# Altium PCB XTR111_PCB.PcbDoc
Units mil, origin at the board's own origin, x right, y up, seen from the top; angles counter-clockwise.
Board outline 1455 x 1260 mil, 2 copper layers (Top Layer, Bottom Layer); 18 components, 13 nets, 49 pads, 5 vias.
Unrouted connection lines stored in the file: 35.
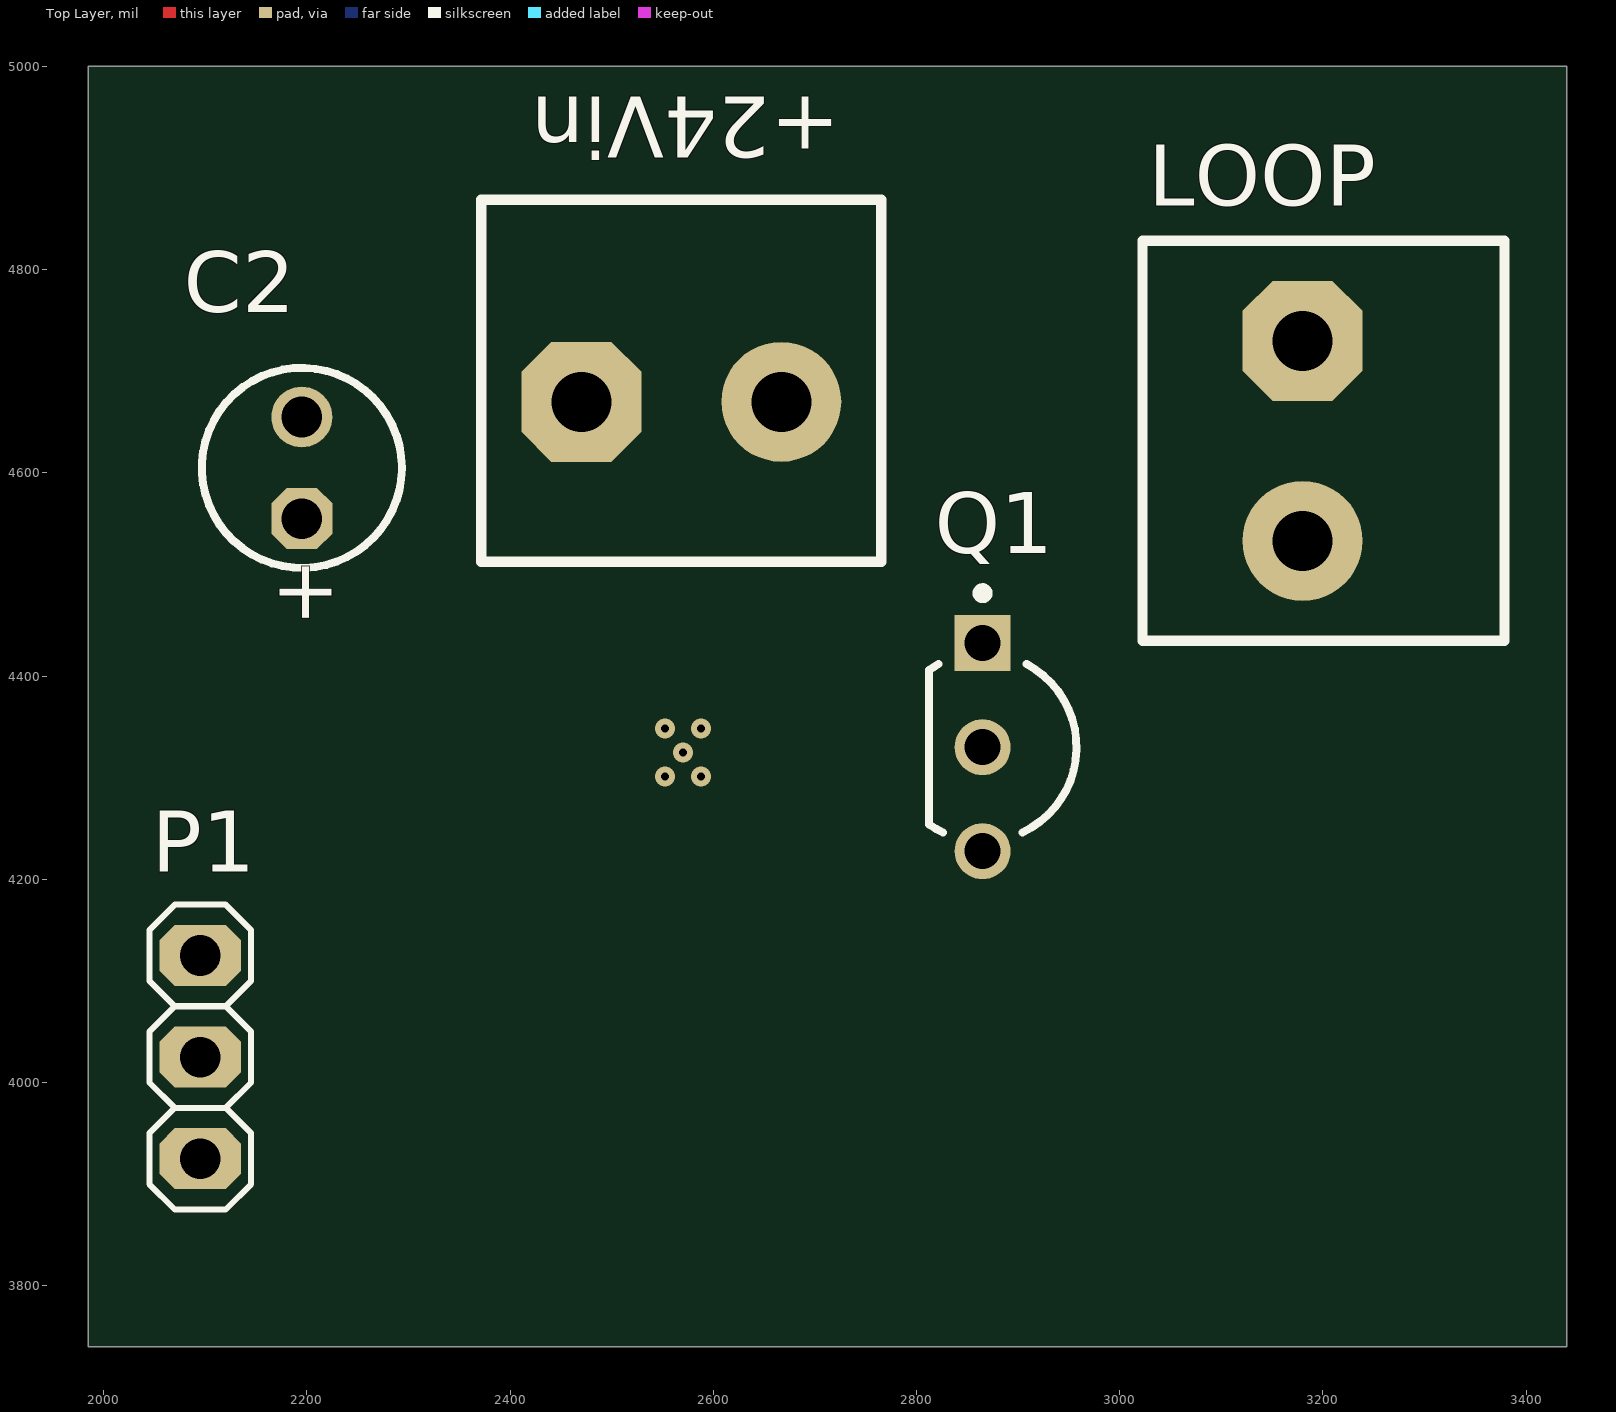
[diagram p0: Top Layer view]
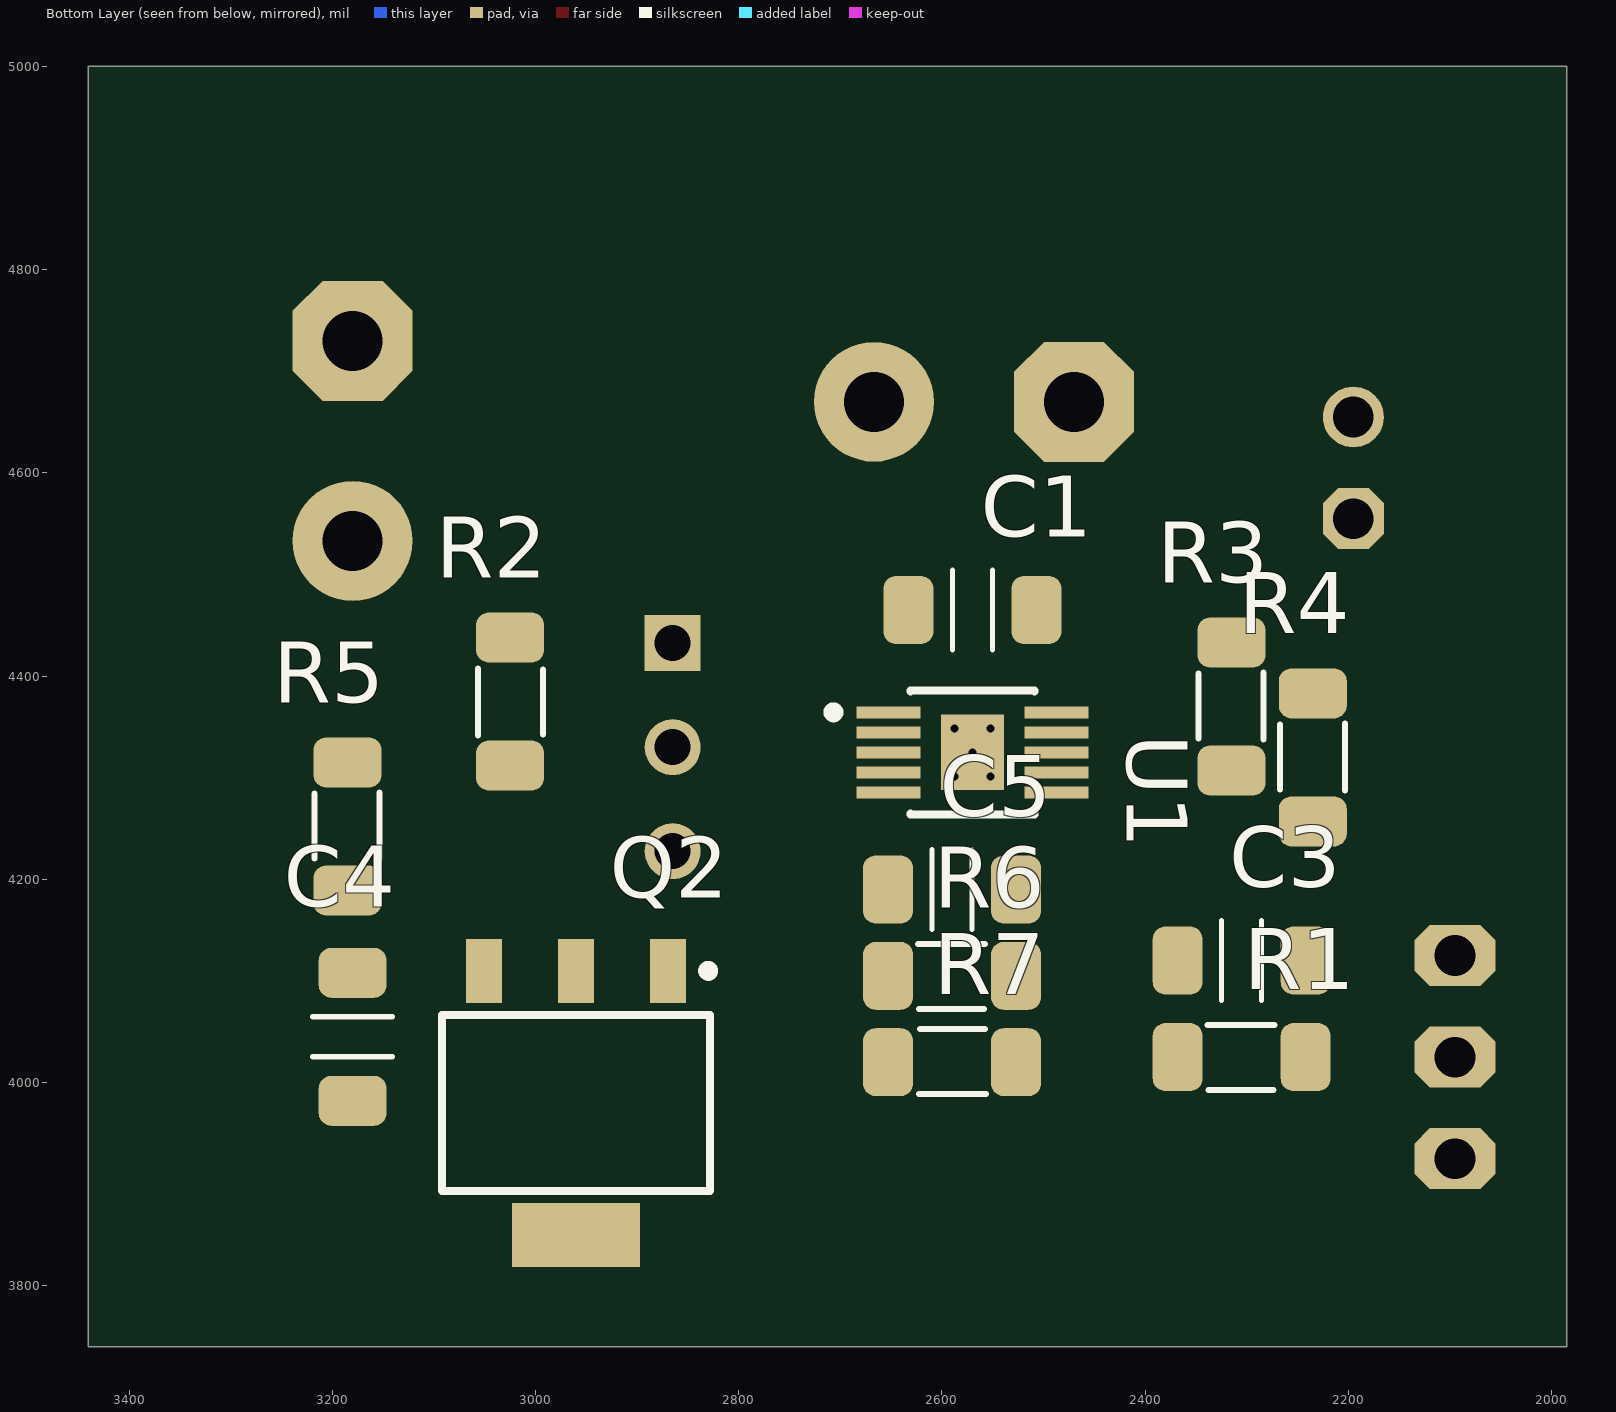
[diagram p1: Bottom Layer view, seen from below]

## Layer stack, top to bottom
Top Solder: solder mask 0.4, Solder Resist, Dk 3.5
Top Layer: signal copper 1.4
Dielectric 1: dielectric 12.6, FR-4, Dk 4.8
Bottom Layer: signal copper 1.4
Bottom Solder: solder mask 0.4, Solder Resist, Dk 3.5

## Board outline
1985,3740 3440,3740 3440,5000 1985,5000

## Design rules (kind name [scope] priority, off if disabled: settings)
Clearance [All] p1: gap=10 ignorepadtopadclearanceinfootprint=FALSE except(0: Arc-Hole Track-Hole SMDPad-Hole THPad-Hole Via-Hole Fill-Hole Poly-Hole Region-Hole Text-Hole)
PolygonConnect [All] p1: connectstyle=Relief reliefconductorwidth=10 reliefentries=4 polygonreliefangle="90 Angle" airgapwidth=10
RoutingVias [All] p1: holewidth=28 width=50 viastyle="Through Hole" minholewidth=28 minwidth=50 maxholewidth=28 maxwidth=50
SolderMaskExpansion [All] p1: expansion=4
Width [All] p1: maxlimit=10 minlimit=10 preferedwidth=10
30 further rules are at their usual default settings.

## Components (designator, comment, footprint, x,y, rotation, side; value= is the part's Value field where it differs from the comment)
+24Vin "CON2 pin blue" "BORNE 2P" 2666.85,4670 r180 top
C1 "100nF" "CAP 1206" 2570,4465 r0 bottom
C2 "10uF" "CAPRADIAL 6.3X11 - 10u" 2195,4605 r90 top
C3 "100nF" "CAP 1206" 2305,4120 r0 bottom
C4 "100nF" "CAP 1206" 3180,4045 r90 bottom
C5 "100nF" "CAP 1206" 2590,4190 r0 bottom
LOOP "CON2 pin blue" "BORNE 2P" 3180,4533.15 r90 top
P1 "Header 3" 1X03 2095,4025 r90 top
Q1 "2N5087RLRAG" ONSC-TO-92-3-29-11_AM_BL 2865,4330 r270 top
Q2 "BSP170P" INF-PG-SOT223_SC-73_N 2960,3980 r270 bottom
R1 "1k" "R1206 Negro" 2305,4025 r180 bottom value=15
R2 "1k" "R1206 Negro" 3025,4375 r90 bottom value=15
R3 "1k" "R1206 Negro" 2315,4370 r270 bottom value=10k
R4 "1k" "R1206 Negro" 2235,4320 r270 bottom value=2.49k
R5 "1k" "R1206 Negro" 3185,4252.01 r270 bottom value=15
R6 "1k" "R1206 Negro" 2590,4105 r180 bottom value=8.25k
R7 "1k" "R1206 Negro" 2590,4020 r0 bottom value=10k
U1 "XTR111AIDGQR" FP-DGQ0010D-MFG 2570,4325 r180 bottom

## Footprints (in the part's own frame and the unit in brackets; to place one, negate y for a bottom-side part, rotate by r counter-clockwise, add the part's x,y. Pads: shape width x height; smd on the part's side, far side on the other; paste and mask are expansions set on the pad)
1X03 [mil]
  oct 60x80 hole 40: 1(-100,0) 2(0,0) 3(100,0)
  silkscreen extent -150,-50 150,50, body extent -150,-57 150,57, height 335
"BORNE 2P" [mm] "Bornera doble"
  oct 3x3 hole 1.5: 1(5,0)
  round 3 hole 1.5: 2(0,0)
  silkscreen extent -2.5,-5.05 7.5,4, body extent -3,-5 7.5,4, height 12.5
"CAP 1206" [mm]
  rrect50% 1.25x1.7 smd: 1(-1.6,0) 2(1.6,0)
  silkscreen extent -0.5,-1 0.5,1, body extent -1.6,-0.8 1.6,0.8, height 1
"CAPRADIAL 6.3X11 - 10u" [mil] "Capacitor, Electrolytic, Radial; Body 5 x 6.8 mm (Dia.xH typ); Pin Spacing 2 mm (typ)"
  oct 60x60 hole 40: 1(-50,0)
  round 60 hole 40: 2(50,0)
  silkscreen extent -98,-98 98,98, body extent -127,-124 123,126, height 454
FP-DGQ0010D-MFG [mm]
  rect 1.6x0.3 smd paste-1000 mask+0: 1(-2.1,1) 2(-2.1,0.5) 3(-2.1,0) 4(-2.1,-0.5) 5(-2.1,-1) 6(2.1,-1) 7(2.1,-0.5) 8(2.1,0) 9(2.1,0.5) 10(2.1,1)
  rect 1.57x1.88 smd paste+0 mask+0: 11(0,0)
  silkscreen extent -3.6,-1.55 1.55,1.55, body extent -2.45,-1.5 2.45,1.5, height 1.1
INF-PG-SOT223_SC-73_N [mm] "SOT223, 4-Leads, Body 6.5x3.5mm, Pitch 2.3mm, IPC Medium Density"
  rect 1.6x0.9 smd: 1(-3.3,2.3) 2(-3.3,0) 3(-3.3,-2.3)
  rect 1.6x3.2 smd: 4(3.3,0)
  silkscreen extent -3.42,-3.35 2.2,3.42, body extent -1.85,-3.35 1.85,3.35, height 1.8
ONSC-TO-92-3-29-11_AM_BL [mm] "TO, 3-Leads, Body Dia 4.7mm, Pitch 2.6mm"
  rect 1.4x1.4 hole 0.9: 1(-2.6,0)
  round 1.4 hole 0.9: 2(0,0) 3(2.6,0)
  silkscreen extent -3.97,-1.34 2.13,2.35, body extent -2.84,-1.34 2.84,2.35, height 5.33
"R1206 Negro" [mm] "Chip Resistor, Empaque 1206"
  rrect50% 1.25x1.7 smd: 1(-1.6,0) 2(1.6,0)
  silkscreen extent -0.85,-0.82 0.82,0.8, body extent -1.6,-0.8 1.6,0.8, height 1

## Part data
+24Vin LOOP: "Connector blue screw"
C1 C3 C4 C5: library part "Cap ceramic", "CAP-100nf / 0402B104K250CT -0603B104K250CT-0805B104K250CT-1206B104K250CT", PartNumber=0402B104K250CT
C2: library part "CAP ELECT", "CAP_AXIAL"
P1: "Header, 3-Pin", LatestRevisionDate=17-Jul-2002, LatestRevisionNote="Re-released for DXP Platform.", Publisher="Altium Limited"
Q1: library part CMP-1048-01483-1, "Amplifier Transistor, PNP Silicon, 3-Pin TO-92, Pb-Free, Tape and Reel", Manufacturer="On Semiconductor", ComponentLink1Description="Manufacturer URL", ComponentLink1URL=http://www.onsemi.com/, ComponentLink2Description=Datasheet, ComponentLink2URL=http://www.onsemi.com/pub_link/Collateral/2N5087-D.PDF, ComponentLink3Description="Package Specification", ComponentLink3URL=http://www.onsemi.com/pub_link/Collateral/MAC97-D.PDF, DatasheetVersion="Rev. 5", fT Min (MHz)=40, IC Continuous (A)=0.05, Mounting Technology="Through Hole", PackageDescription="3-Pin Transistor Outline, Body 4.825 x 3.685 mm, Pitch 1.27 mm", PackageReference=TO-92-3-29-11_AM_BL, PackageVersion="Rev. AM", Packing="Tape and Reel", PartNumber=2N5087RLRAG, Polarity=PNP, RoHS=TRUE
Q2: library part CMP-1099-00020-1, "P-Channel SIPMOS Small-Signal-Transistor, -60 V VDS, -1.9 A ID, -55 to 150 degC, PG-SOT223 (SC-73), Reel, Green", Manufacturer=Infineon, ComponentLink1Description="Manufacturer URL", ComponentLink1URL=http://www.infineon.com/, ComponentLink2Description=Datasheet, ComponentLink2URL=http://www.infineon.com/dgdl/BSP170P_Rev2.53.pdf?folderId=db3a304314dca38901154a72e3951a65&fileId=db3a30433b47825b013b5fdad470576f, ComponentLink3Description="Package Specification", ComponentLink3URL=http://www.infineon.com/dgdl/SOT223-Package_Overview.pdf?folderId=db3a30431936bc4b0119530470b03c3d&fileId=db3a30431936bc4b0119531d40b93c5c, DatasheetVersion="Rev. 2.53", Green=TRUE, Halogen-free=TRUE, ID (max)="-1.9 A", IDpuls (max)="-7.6 A", Mode=Enhancement, Mounting Technology="Surface Mount", PackageDescription="4-Pin Small Outline Transistor Package, 6.5 x 3.5 mm Body, 2.3 mm Pitch", PackageReference="PG-SOT223 (SC-73)", PackageVersion=Apr-08, Packing=Reel, PartNumber=BSP170P, Polarity=P, Pto t (max)="1.8 mW", QG="-12.5 nC", RDS (on) (max)="300 mOhm", Rth="110 K/W", Technology=SIPMOS, VDS (max)="-60 V", VGS(th) (max)="-4 V", VGS(th) (min)="-2.1 V"
R1 R2 R3 R4 R5 R6 R7: library part Res, "resistor"
U1: library part CMP-04883-000001-1, "IC PREC VOLT-CURR CONV/TX 10MSOP", Manufacturer="Texas Instruments", Max Supply Voltage=44V, Min Supply Voltage=7V, Nominal Supply Current=450uA, Package=DGQ0010D, Temperature="-40°C to +125°C", Temperature Range High=+125°C, Temperature Range Low=-40°C, Automotive=No, Category=IC, ComponentLink2Description=Datasheet, ComponentLink2URL=http://www.ti.com/lit/ds/symlink/xtr111.pdf, Device Class L1="Integrated Circuits (ICs)", Device Class L2="Interface ICs", Device Class L3="Sensor and Detector Interfaces", Digikey Description="IC PREC VOLT-CURR CONV/TX 10MSOP", Height=1.1mm, Ipc Land Pattern Name=SOP50P490X110-10, Lead Free=Yes, Manufacturer Part Number=XTR111AIDGQR, Mouser Description="Sensor Interface Prec Vltg-to-Crnt Conv/Transmitter", Octopart=https://octopart.com/xtr111aidgqr-texas+instruments-7116478, RoHS=TRUE, Sensor Input="Analog Voltage", Sensor Output="Analog Voltage", Sensor Type String="Current Transmitter", Standoff Height=0.05mm

## Via types
v1: diameter 19.68, hole 7.87, Top Layer to Bottom Layer, 5 vias

## Nets (pads, with @x,y where several pads share a name; then routed paths per layer and width w, separated by ;. In a path a pad name is that pad's centre, name@x,y a point inside that pad or via, vN(x,y) a via of type N, cw(c..) or ccw(c..) an arc to the next point about the centre after c; other vN are vias at no path point)
+24V: +24Vin.2 C1.2 C2.1 U1.1
GND: +24Vin.1 C1.1 C2.2 C3.1 C4.1 C5.1 LOOP.1 P1.3 R3.1 R4.1 R7.1 U1.10 U1.11
  other v1: 2552.28,4301.38 2587.72,4301.38 2570,4325 2552.28,4348.62 2587.72,4348.62
IS: Q1.1 R2.2 U1.2
NetC4_2: C4.2 Q2.2 Q2.4 R5.2
NetLOOP_2: LOOP.2 R5.1
NetP1_2: P1.2 R1.2
NetQ1_2: Q1.2 Q2.3 R2.1
NetR3_2: R3.2 U1.9
NetR4_2: R4.2 U1.7
REGF: C5.2 P1.1 R6.2 U1.5
REGS: R6.1 R7.2 U1.4
VG: Q1.3 Q2.1 U1.3
Vin_DAC: C3.2 R1.1 U1.6
pads on no net: U1.8

## Text inside footprints (layer, text, board x,y; h text height)
C2: Top Overlay "+" at 2224.53,4448.5 h59.06 r90